# EAGLE board Tube Board Single Sided (EAGLE 5.11)
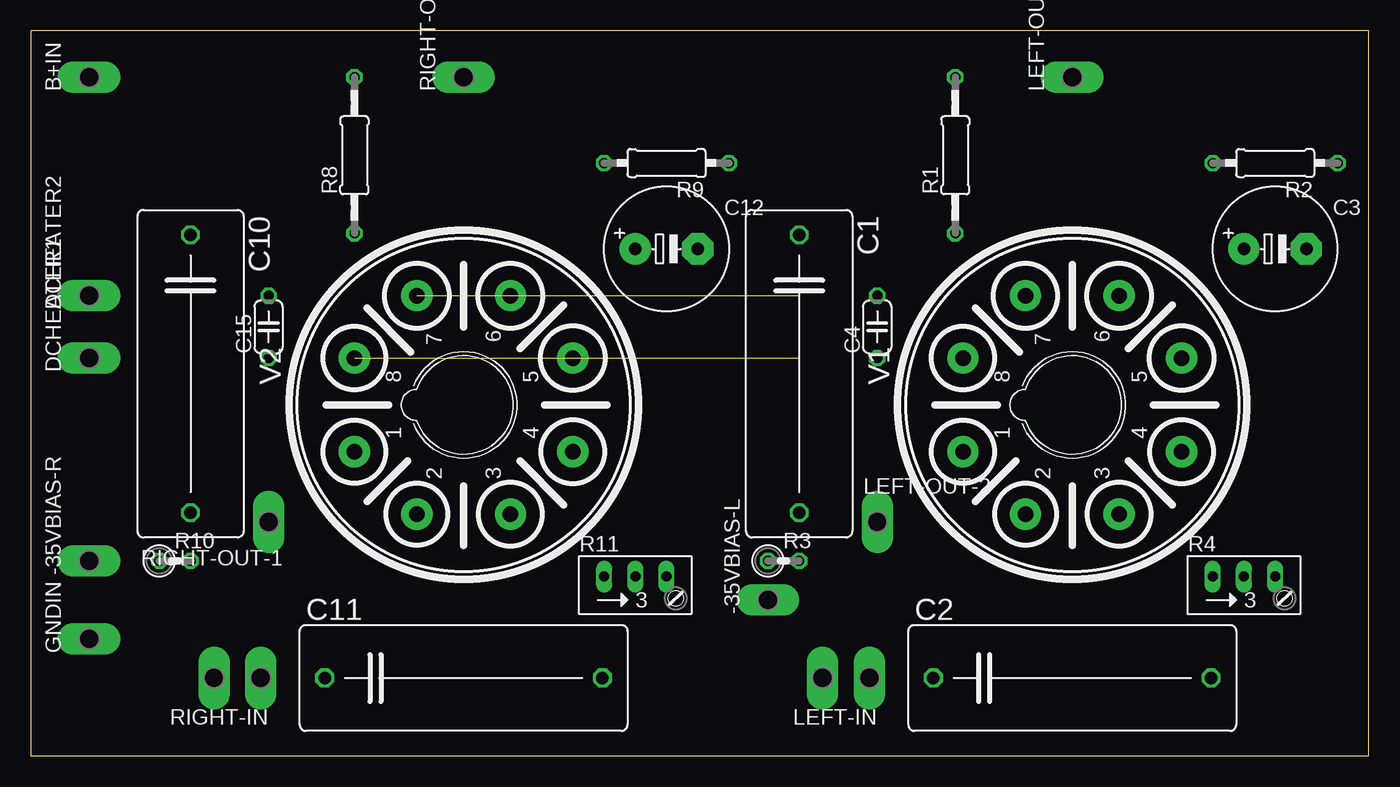
[diagram p0: board, top side]
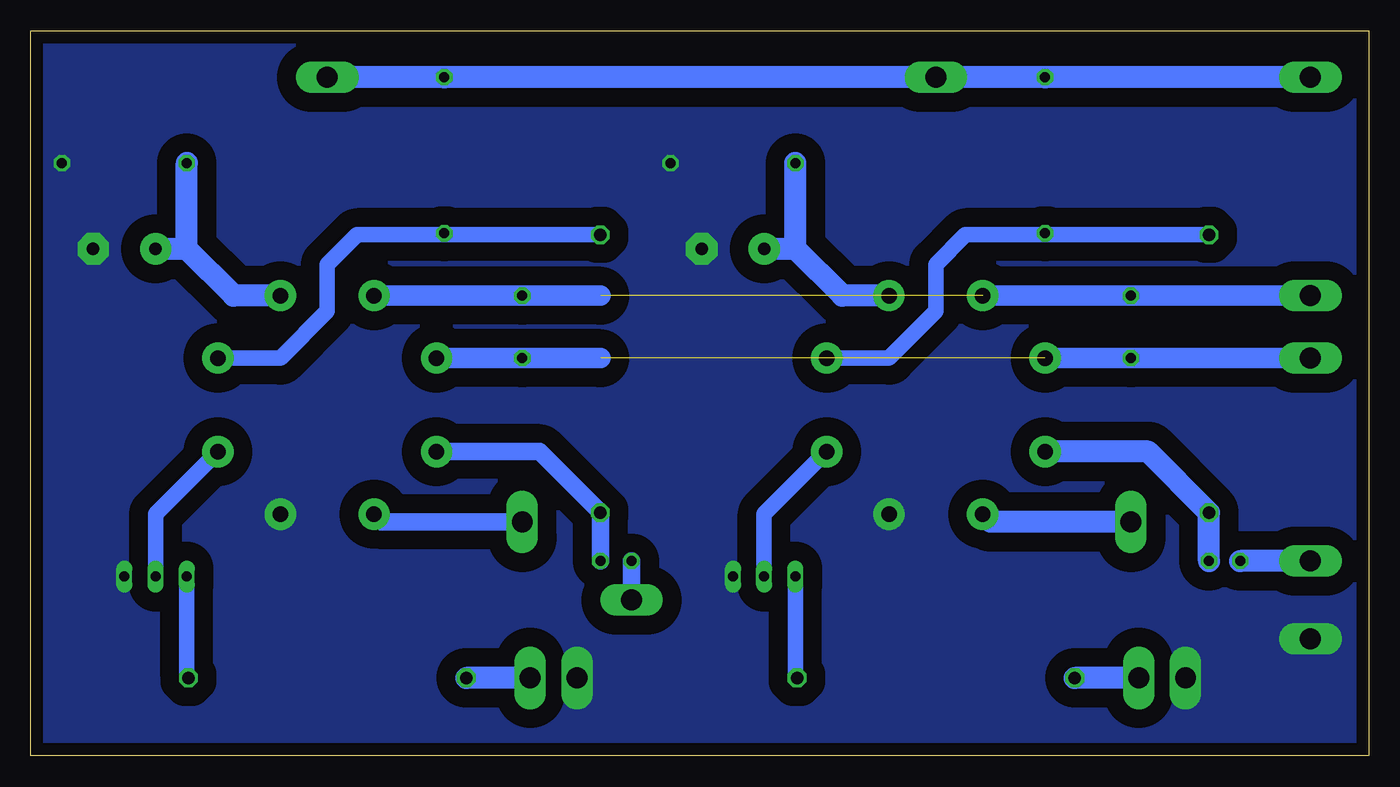
[diagram p1: board, bottom side, seen from below]

Size 108.89 x 59.03 mm. Coordinates in mm from the lower left corner, seen from the top.
Outline: 108.89,0 108.89,59.03 0,59.03 0,0 108.89,0
Copper layers (1*16): Top 0.035mm / dielectric 1.5mm / Bottom 0.035mm
Design rules "default *": minimum track width 10mil, minimum drill 24mil, track to track 60mil, track to pad 60mil, pad to pad 60mil, via to via 60mil, smd to smd 60mil, copper to edge 40mil, drill to drill 8mil, minimum pad ring 10mil, minimum via ring 8mil, stop-mask expansion 4mil, vias tented up to drill 0mil, thermal gap 10mil

## Footprints (pad centres in the part's own frame; a part is rotated, then mirrored left to right if it is on the bottom)
P1-17Y = drill 1.702 pad 2.121 long: TP 0,0
C225-087X268 = drill 1.016 octagon: 1 -11.303,0; 2 11.303,0
E5-10,5 = drill 1.016 pad 2.54 round: + -2.54,0 | drill 1.016 pad 2.54 octagon: - 2.54,0
C050-024X044 = drill 0.813 octagon: 1 -2.54,0; 2 2.54,0
P2-38-17 = drill 1.702 pad 2.121 long: TP-1 -1.905,0; TP-2 1.905,0
0207/12 = drill 0.813 octagon: 1 -6.35,0; 2 6.35,0
0207/10 = drill 0.813 octagon: 1 -5.08,0; 2 5.08,0
0207/2V = drill 0.813 octagon: 1 -1.27,0; 2 1.27,0
RJ9W = drill 0.813 long: A 2.54,0.635; E -2.54,0.635; S 0,0.635
OKTAL = drill 1.27 pad 2.54 round: 1 3.81,-8.89; 2 8.89,-3.81; 3 8.89,3.81; 4 3.81,8.89; 5 -3.81,8.89; 6 -8.89,3.81; 7 -8.89,-3.81; 8 -3.81,-8.89

## Placement (x,y rotation side)
-35VBIAS-L  PTR1PAD1-17Y  [P1-17Y]  60,12.7 90 top
-35VBIAS-R  PTR1PAD1-17Y  [P1-17Y]  4.75,15.88 90 top
B+IN  PTR1PAD1-17Y  [P1-17Y]  4.75,55.24 90 top
C1  0.015uF  [C225-087X268]  62.54,31.11 270 top
C2  0.1uF  [C225-087X268]  84.76,6.35 0 top
C3  100uF  [E5-10,5]  101.27,41.27 0 top
C4  1uF  [C050-024X044]  68.89,34.92 90 top
C10  0.015uF  [C225-087X268]  13.01,31.11 270 top
C11  0.1uF  [C225-087X268]  35.23,6.35 0 top
C12  100uF  [E5-10,5]  51.74,41.27 0 top
C15  1uF  [C050-024X044]  19.36,34.92 90 top
DCHEATER1  PTR1PAD1-17Y  [P1-17Y]  4.75,32.38 90 top
DCHEATER2  PTR1PAD1-17Y  [P1-17Y]  4.75,37.47 90 top
GNDIN  PTR1PAD1-17Y  [P1-17Y]  4.75,9.53 90 top
LEFT-IN  PTR2  [P2-38-17]  66.34,6.35 180 top
LEFT-OUT-1  PTR1PAD1-17Y  [P1-17Y]  84.76,55.24 90 top
LEFT-OUT-2  PTR1PAD1-17Y  [P1-17Y]  68.89,19.05 0 top
R1  47K  [0207/12]  75.23,48.9 90 top
R2  820R  [0207/10]  101.27,48.26 180 top
R3  470K  [0207/2V]  61.27,15.88 0 top
R4  100K  [RJ9W]  98.73,13.97 0 top
R8  47K  [0207/12]  26.34,48.9 90 top
R9  820R  [0207/10]  51.74,48.26 180 top
R10  470K  [0207/2V]  11.73,15.88 0 top
R11  100K  [RJ9W]  49.2,13.97 0 top
RIGHT-IN  PTR2  [P2-38-17]  16.82,6.35 180 top
RIGHT-OUT-1  PTR1PAD1-17Y  [P1-17Y]  19.36,19.05 180 top
RIGHT-OUT-2  PTR1PAD1-17Y  [P1-17Y]  35.23,55.24 90 top
V1  13EM7  [OKTAL]  84.76,28.57 270 top
V2  13EM7  [OKTAL]  35.23,28.57 270 top

## Library data of the parts
-35VBIAS-L -35VBIAS-R B+IN DCHEATER1 DCHEATER2 GNDIN LEFT-IN LEFT-OUT-1 LEFT-OUT-2 RIGHT-IN RIGHT-OUT-1 RIGHT-OUT-2 = testpad
C1-C3 C10-C12 = rcl
C4 C15 R1-R3 R8-R10 = resistor
R4 R11 = pot
V1 V2 = tubes

## Nets
B+: B+IN.TP LEFT-OUT-1.TP R1.2 R8.2 RIGHT-OUT-2.TP
GND: C3.- C12.- GNDIN.TP LEFT-IN.TP-2 R2.1 R4.A R9.1 R11.A RIGHT-IN.TP-2 V1.3 V2.3
HEATER: C4.1 C15.1 DCHEATER1.TP V1.8 V2.8
N$1: C4.2 C15.2 DCHEATER2.TP V1.7 V2.7
N$2: -35VBIAS-R.TP R10.1
N$4: C1.1 R1.1 V1.5
N$5: C3.+ R2.2 V1.6
N$6: C1.2 R3.2 V1.1
N$7: C2.2 R4.E
N$8: R4.S V1.4
N$9: C2.1 LEFT-IN.TP-1
N$10: C10.1 R8.1 V2.5
N$11: LEFT-OUT-2.TP V1.2
N$13: -35VBIAS-L.TP R3.1
N$16: C12.+ R9.2 V2.6
N$17: C10.2 R10.2 V2.1
N$18: C11.2 R11.E
N$19: R11.S V2.4
N$20: C11.1 RIGHT-IN.TP-1
N$21: RIGHT-OUT-1.TP V2.2

## Tracks (layer width: path | path; a pad name or v marks a point on that pad's centre or on a via)
B+
  Bottom 1.778: B+IN.TP R8.2 RIGHT-OUT-2.TP R1.2 LEFT-OUT-1.TP
GND
  pour Bottom (no thermals): 0.3,0 108.89,0 108.89,59.05 0.3,59.05
HEATER  (1 unrouted)
  Bottom 1.676: V1.8 C4.1 62.54,32.38 | DCHEATER1.TP C15.1 V2.8
N$1  (1 unrouted)
  Bottom 1.676: V1.7 C4.2 62.54,37.47 | DCHEATER2.TP C15.2 V2.7
N$2
  Bottom 1.778: -35VBIAS-R.TP R10.1
N$4
  Bottom 1.27: C1.1 75.23,42.42 | 75.23,42.42 82.35,42.42 84.76,40.01 84.76,36.2 88.57,32.38 V1.5 | 75.23,42.42 R1.1
N$5
  Bottom 1.778: V1.6 92.38,37.47 96.19,41.27 | 96.19,41.27 R2.2 | 96.19,41.27 C3.+
N$6
  Bottom 1.422: V1.1 67.49,24.77 C1.2 R3.2
N$7
  Bottom 1.27: R4.E 96.19,6.48 C2.2
N$8
  Bottom 1.27: R4.S 98.73,19.68 V1.4
N$9
  Bottom 1.778: LEFT-IN.TP-1 C2.1
N$10
  Bottom 1.27: C10.1 26.34,42.42 | 26.34,42.42 32.82,42.42 35.23,40.01 35.23,36.2 39.04,32.38 V2.5 | 26.34,42.42 R8.1
N$11
  Bottom 1.422: LEFT-OUT-2.TP 80.31,19.05 V1.2
N$13
  Bottom 1.422: -35VBIAS-L.TP R3.1
N$16
  Bottom 1.778: 46.66,41.27 R9.2 | 46.66,41.27 42.85,37.47 V2.6 | 46.66,41.27 C12.+
N$17
  Bottom 1.778: V2.1 17.96,24.77 C10.2 R10.2
N$18
  Bottom 1.27: R11.E 46.66,6.48 C11.2
N$19
  Bottom 1.27: R11.S 49.2,19.68 V2.4
N$20
  Bottom 1.778: RIGHT-IN.TP-1 C11.1
N$21
  Bottom 1.778: RIGHT-OUT-1.TP 30.79,19.05 V2.2